# Altium PCB Gen_Test.PcbDoc
Units mm, origin at the board's own origin, x right, y up, seen from the top; angles counter-clockwise.
Board outline 50.29 x 40.51 mm, 2 copper layers (Top Layer, Bottom Layer); 32 components, 31 nets, 130 pads, 75 vias.
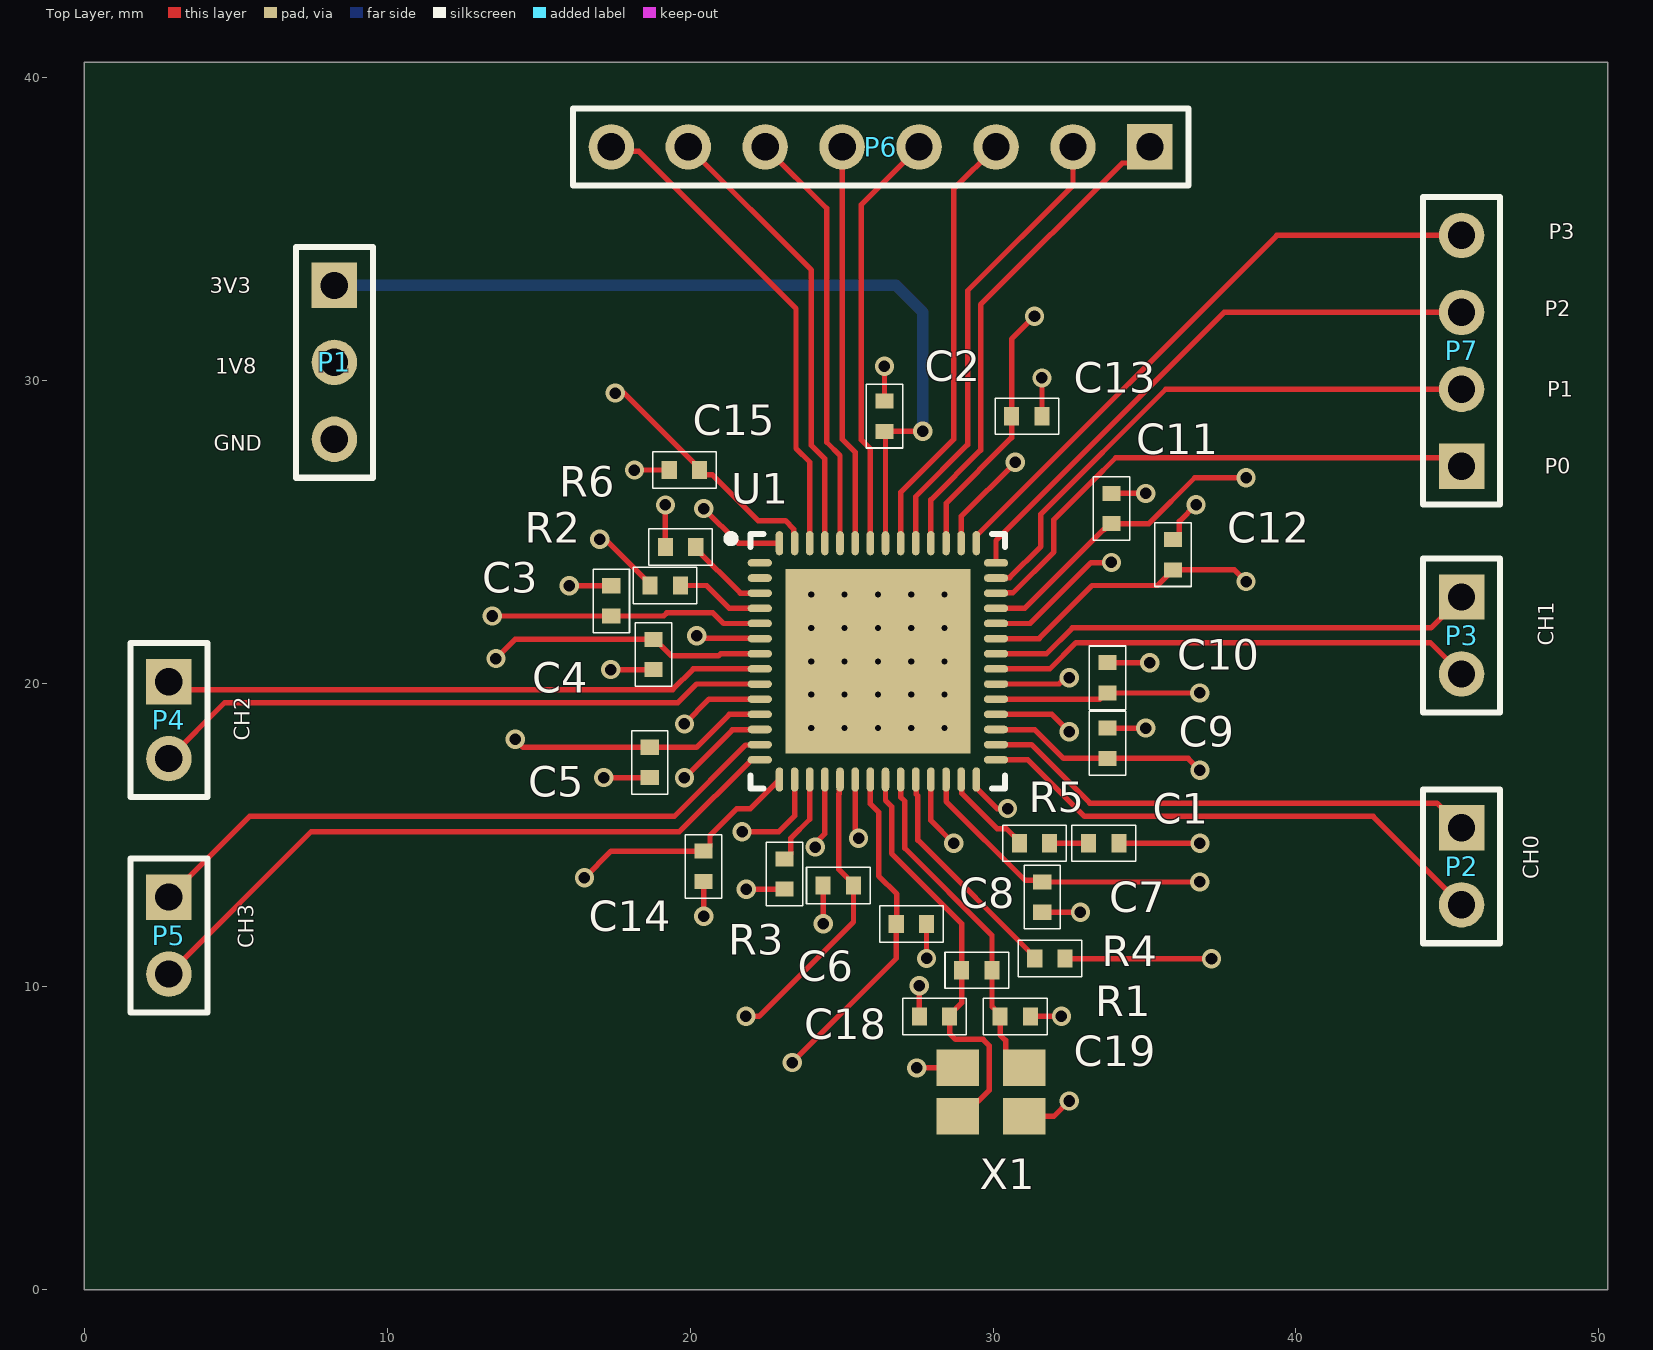
[diagram p0: Top Layer view]
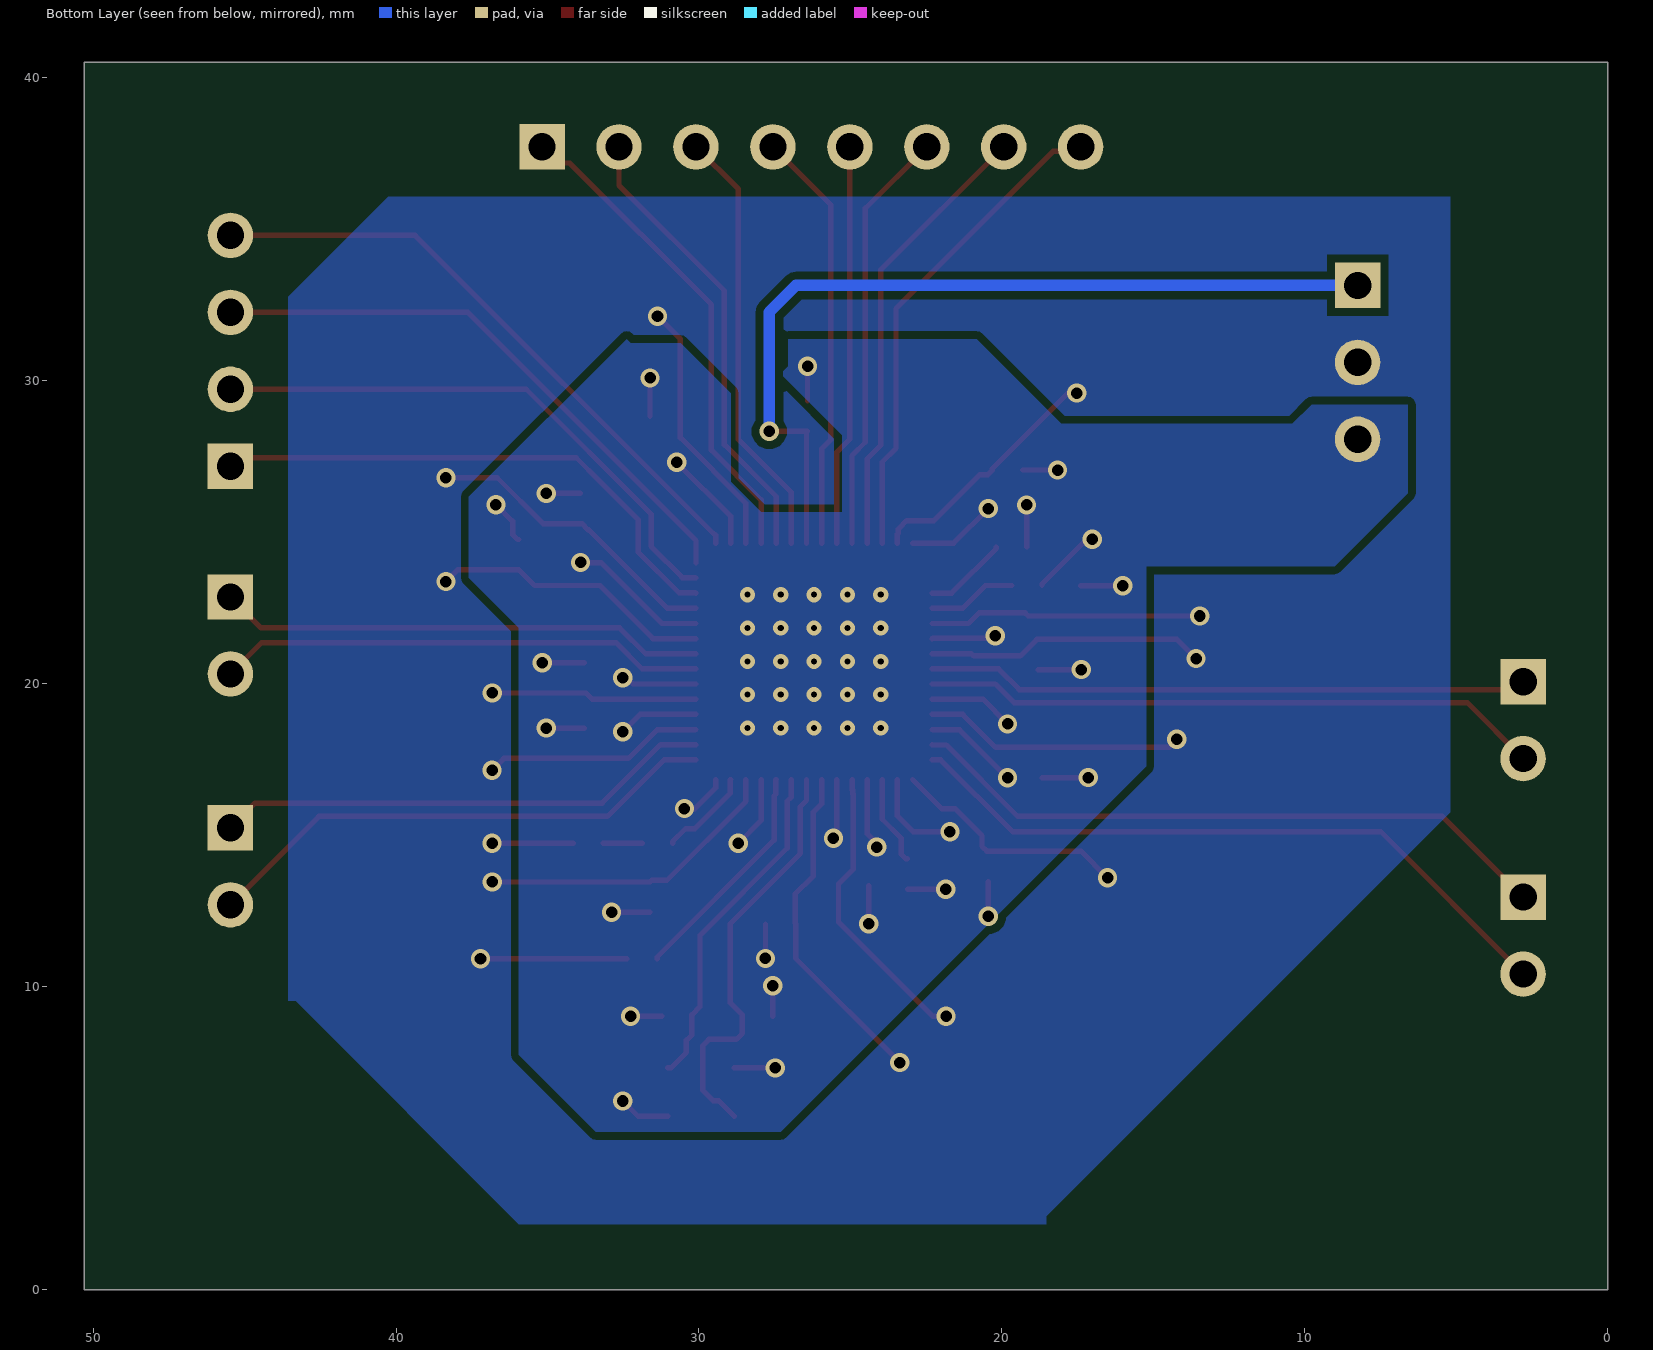
[diagram p1: Bottom Layer view, seen from below]

## Layer stack, top to bottom
Top Solder: solder mask 0.0102, Solder Resist, Dk 3.5
Top Layer: signal copper 0.0356
Dielectric 1: dielectric 0.32, FR-4, Dk 4.8
Bottom Layer: signal copper 0.0356
Bottom Solder: solder mask 0.0102, Solder Resist, Dk 3.5

## Board outline
0,0 0,40.513 50.292,40.513 50.292,0

## Design rules (kind name [scope] priority, off if disabled: settings)
Clearance [All] p1: gap=0.254 ignorepadtopadclearanceinfootprint=FALSE except(0: Arc-Hole Track-Hole SMDPad-Hole THPad-Hole Via-Hole Fill-Hole Poly-Hole Region-Hole Text-Hole)
PolygonConnect [All] p1: connectstyle=Direct reliefconductorwidth=0.254 reliefentries=4 polygonreliefangle="90 Angle" airgapwidth=0.254
RoutingVias RoutingVias_1 [All] p1: holewidth=0.381 width=0.635 viastyle="Through Hole" minholewidth=0.381 minwidth=0.508 maxholewidth=0.711 maxwidth=1.27
RoutingVias [All] p2: holewidth=0.381 width=0.635 viastyle="Through Hole" minholewidth=0.381 minwidth=0.508 maxholewidth=0.711 maxwidth=1.27
SolderMaskExpansion [All] p1: expansion=0.102 istentingtop=FALSE
Width [All] p1: maxlimit=1.27 minlimit=0.178 preferedwidth=0.254 minimp=50.000000 maximp=50.000000 favimp=50.000000
30 further rules are at their usual default settings.

## Classes and differential pairs
component class DDS_Module: C1 C2 C3 C4 C5 C6 C7 C8 C9 C10 C11 C12 C13 C14 C15 P1 P2 P3 P4 P5 P6 P7 R1 R2 R3 R4 R5 R6 U1 X1

## Components (designator, comment, footprint, x,y, rotation, side; value= is the part's Value field where it differs from the comment)
C1 "Cap" 0402_Res 33.655,14.732 r0 top value=680p
C2 "Cap" 0402_Res 26.416,28.829 r270 top value=0.1u
C3 "Cap" 0402_Res 17.399,22.733 r270 top value=0.1u
C4 "Cap" 0402_Res 18.796,20.963 r90 top value=0.1u
C5 "Cap" 0402_Res 18.669,17.399 r90 top value=0.1u
C6 "Cap" 0402_Res 24.892,13.335 r0 top value=0.1u
C7 "Cap" 0402_Res 31.623,12.954 r90 top value=0.1u
C8 "Cap" 0402_Res 27.305,12.065 r180 top value=0.1u
C9 "Cap" 0402_Res 33.782,18.034 r270 top value=0.1u
C10 "Cap" 0402_Res 33.782,20.193 r270 top value=0.1u
C11 "Cap" 0402_Res 33.909,25.781 r270 top value=0.1u
C12 "Cap" 0402_Res 35.941,24.257 r270 top value=0.1u
C13 "Cap" 0402_Res 31.115,28.829 r180 top value=0.1u
C14 "Cap" 0402_Res 20.447,13.97 r90 top value=0.1u
C15 "Cap" 0402_Res 19.812,27.051 r0 top value=0.1u
C18 "Cap" 0402_Res 28.067,9.017 r0 top value=39p
C19 "Cap" 0402_Res 30.734,9.017 r180 top value=39p
P1 "Header 3" HDR1X3 8.255,33.147 r270 top
P2 "Header 2" HDR1X2 45.466,15.24 r270 top
P3 "Header 2" HDR1X2 45.466,22.86 r270 top
P4 "Header 2" HDR1X2 2.794,20.066 r270 top
P5 "Header 2" HDR1X2 2.794,12.954 r270 top
P6 "Header 8" HDR1X8 35.179,37.719 r180 top
P7 "Header 4" HDR1X4 45.466,27.178 r90 top
R1 "DNP" 0402_Res 29.464,10.541 r180 top value=1M
R2 "Res1" 0402_Res 19.177,23.241 r180 top value=4.7k
R3 "Res1" 0402_Res 23.114,13.716 r270 top value=1.91k
R4 "Res1" 0402_Res 31.877,10.922 r180 top value=4.7k
R5 "Res1" 0402_Res 31.369,14.732 r0 top value=0
R6 "Res1" 0402_Res 19.685,24.511 r0 top value=4.7k
U1 "AD9959BCPZ-REEL7" ADI-CP-56-1_L 26.199,20.737 r0 top
X1 "XTAL" XTAL_Basic 31.029,7.315 r180 top

## Footprints (in the part's own frame and the unit in brackets; to place one, negate y for a bottom-side part, rotate by r counter-clockwise, add the part's x,y. Pads: shape width x height; smd on the part's side, far side on the other; paste and mask are expansions set on the pad)
0402_Res [mm]
  rect 0.5x0.6 smd: 1(-0.5,0) 2(0.5,0)
  silkscreen extent -1.05,-0.6 1.05,0.6
ADI-CP-56-1_L [mm] "QFN, 56-Leads, Body 8x8mm, Pitch 0.5mm, Thermal Pad 6.1x6.1mm, IPC High Density"
  oval 0.8x0.25 smd: 1(-3.9,3.25) 2(-3.9,2.75) 3(-3.9,2.25) 4(-3.9,1.75) 5(-3.9,1.25) 6(-3.9,0.75) 7(-3.9,0.25) 8(-3.9,-0.25) 9(-3.9,-0.75) 10(-3.9,-1.25) 11(-3.9,-1.75) 12(-3.9,-2.25) 13(-3.9,-2.75) 14(-3.9,-3.25) 29(3.9,-3.25) 30(3.9,-2.75) 31(3.9,-2.25) 32(3.9,-1.75) 33(3.9,-1.25) 34(3.9,-0.75) 35(3.9,-0.25) 36(3.9,0.25) 37(3.9,0.75) 38(3.9,1.25) 39(3.9,1.75) 40(3.9,2.25) 41(3.9,2.75) 42(3.9,3.25)
  oval 0.25x0.8 smd: 15(-3.25,-3.9) 16(-2.75,-3.9) 17(-2.25,-3.9) 18(-1.75,-3.9) 19(-1.25,-3.9) 20(-0.75,-3.9) 21(-0.25,-3.9) 22(0.25,-3.9) 23(0.75,-3.9) 24(1.25,-3.9) 25(1.75,-3.9) 26(2.25,-3.9) 27(2.75,-3.9) 28(3.25,-3.9) 43(3.25,3.9) 44(2.75,3.9) 45(2.25,3.9) 46(1.75,3.9) 47(1.25,3.9) 48(0.75,3.9) 49(0.25,3.9) 50(-0.25,3.9) 51(-0.75,3.9) 52(-1.25,3.9) 53(-1.75,3.9) 54(-2.25,3.9) 55(-2.75,3.9) 56(-3.25,3.9)
  rect 6.1x6.1 smd: 57(0,0)
  silkscreen extent -4.97,-4.2 4.2,4.2, body extent -4.05,-4.05 4.05,4.05, height 1
HDR1X2 [mm] "Connector; Header; 2 Position"
  rect 1.5x1.5 hole 0.9: 1(0,0)
  round 1.5 hole 0.9: 2(2.54,0)
  silkscreen extent -1.27,-1.27 3.81,1.27
HDR1X3 [mm] "Connector; Header; 3 Position"
  rect 1.5x1.5 hole 0.9: 1(0,0)
  round 1.5 hole 0.9: 2(2.54,0) 3(5.08,0)
  silkscreen extent -1.27,-1.27 6.35,1.27
HDR1X4 [mm] "Connector; Header; 4 Position"
  rect 1.5x1.5 hole 0.9: 1(0,0)
  round 1.5 hole 0.9: 2(2.54,0) 3(5.08,0) 4(7.62,0)
  silkscreen extent -1.27,-1.27 8.89,1.27
HDR1X8 [mm] "Connector; Header; 8 Position"
  rect 1.5x1.5 hole 0.9: 1(0,0)
  round 1.5 hole 0.9: 2(2.54,0) 3(5.08,0) 4(7.62,0) 5(10.16,0) 6(12.7,0) 7(15.24,0) 8(17.78,0)
  silkscreen extent -1.27,-1.27 19.05,1.27
XTAL_Basic [mm]
  rect 1.4x1.2 smd: 1(0,0) 2(2.2,0) 3(2.2,1.6) 4(0,1.6)

## Part data
C1 C2 C3 C4 C5 C6 C7 C8 C9 C10 C11 C12 C13 C14 C15 C18 C19: "Capacitor", LatestRevisionDate=17-Jul-2002, LatestRevisionNote="Re-released for DXP Platform.", PackageDescription="Radial Cap, Thru-Hole; 2 Leads; 0.3 in Pin Spacing", PackageReference=RAD-0.3, Published=8-Jun-2000, Publisher="Altium Limited"
P1: "Header, 3-Pin", LatestRevisionDate=17-Jul-2002, LatestRevisionNote="Re-released for DXP Platform.", Publisher="Altium Limited"
P2 P3 P4 P5: "Header, 2-Pin", LatestRevisionDate=17-Jul-2002, LatestRevisionNote="Re-released for DXP Platform.", Publisher="Altium Limited"
P6: "Header, 8-Pin", LatestRevisionDate=17-Jul-2002, LatestRevisionNote="Re-released for DXP Platform.", Publisher="Altium Limited"
P7: "Header, 4-Pin", LatestRevisionDate=17-Jul-2002, LatestRevisionNote="Re-released for DXP Platform.", Publisher="Altium Limited"
R1: library part Res1, "Resistor", LatestRevisionDate=17-Jul-2002, LatestRevisionNote="Re-released for DXP Platform.", PackageDescription="Axial Device, Thru-Hole; 2 Leads; 0.3 in Pin Spacing", PackageReference=AXIAL-0.3, Published=8-Jun-2000, Publisher="Altium Limited"
R2 R3 R4 R5 R6: "Resistor", LatestRevisionDate=17-Jul-2002, LatestRevisionNote="Re-released for DXP Platform.", PackageDescription="Axial Device, Thru-Hole; 2 Leads; 0.3 in Pin Spacing", PackageReference=AXIAL-0.3, Published=8-Jun-2000, Publisher="Altium Limited"
U1: library part CMP-0293-00013-1, "4-Channel, 500 MSPS DDS with 10-Bit DACs, Serial, CP-56-1, 750 Reel, Pb-Free", Code_JEDEC=MO-220-VLLD-2, Compliance Range (V)=2.3V, ComponentLink1Description="Manufacturer URL", ComponentLink1URL=www.analog.com, ComponentLink2Description=Datasheet, ComponentLink2URL=http://www.analog.com/static/imported-files/data_sheets/AD9959.pdf, ComponentLink3Description="Package Specification", ComponentLink3URL=http://www.analog.com/static/imported-files/packages/32698137492825CP_56_1.pdf, DatasheetVersion="Rev. B", FS Iout (mA nom)=10mA, I Supply total (max)=180mA, I/O Interface=Serial, Master fclk=500MHz, PackageDescription="56-Lead Lead Frame Chip Scale Package [LFCSP_VQ]", PackageReference=CP-56-1, PackageVersion=112805-0, REFCLK Multiplier=Yes, Resolution (Bits)=10bit, Tuning Word Width (bits)=32bit
X1: Supplier Part Number 1=SER3691CT-ND, ComponentLink1Description="New link", Supplier 1=DigiKey

## Via types
v1: diameter 0.635, hole 0.381, Top Layer to Bottom Layer, 50 vias
v2: diameter 0.5, hole 0.2, Top Layer to Bottom Layer, 25 vias

## Nets (pads, with @x,y where several pads share a name; then routed paths per layer and width w, separated by ;. In a path a pad name is that pad's centre, name@x,y a point inside that pad or via, vN(x,y) a via of type N, cw(c..) or ccw(c..) an arc to the next point about the centre after c; other vN are vias at no path point)
1V8: C1.2 C3.2 C4.2 C5.2 C6.2 C7.2 C8.2 C9.2 C10.2 C11.2 C12.2 C13.2 C14.2 C15.2 P1.2 R4.1 U1.5 U1.7 U1.11 U1.15 U1.19 U1.21 U1.26 U1.31 U1.33 U1.37 U1.39 U1.45 U1.55 | length 123.9
  Top Layer w0.178: v1(13.47,22.233) C3.2 19.129,22.233 19.234,22.338 20.752,22.338 21.103,21.987 U1.5 ; v1(13.589,20.828) 14.224,21.463 C4.2 18.846,21.463 19.39,20.919 20.939,20.919 21.007,20.987 U1.7 ; v1(14.224,18.161) 14.486,17.899 C5.2 20.209,17.899 21.297,18.987 U1.11 ; v1(16.51,13.589) 17.391,14.47 C14.2 20.497,14.47 20.658,14.631 20.658,14.988 21.545,15.875 21.987,15.875 U1.15 ; v1(17.526,29.591) 17.822,29.591 20.312,27.101 C15.2 20.463,26.9 20.725,26.9 22.245,25.38 23.143,25.38 23.417,25.106 23.417,24.964 23.449,24.932 U1.55 ; v1(21.844,9.017) 22.27,9.017 25.392,12.139 C6.2 25.392,13.385 24.901,13.876 24.901,16.352 24.917,16.368 24.917,16.479 24.935,16.497 24.935,16.823 U1.19 ; v1(23.368,7.493) 26.805,10.93 C8.2 26.822,12.082 26.822,13.056 26.222,13.656 26.222,15.761 25.949,16.034 U1.21 ; U1.26 28.449,16.117 31.056,13.51 31.567,13.51 C7.2 v1(36.822,13.454) ; U1.45 28.449,25.954 30.615,28.12 C13.2 30.615,31.377 v1(31.369,32.131) ; U1.31 30.113,18.473 31.387,18.473 32.326,17.534 C9.2 36.441,17.534 v1(36.83,17.145) ; U1.33 33.526,19.487 33.732,19.693 C10.2 v1(36.822,19.693) ; U1.37 31.52,21.487 33.274,23.241 35.425,23.241 C12.2 37.965,23.757 v1(38.354,23.368) ; U1.39 31.045,22.487 33.635,25.078 33.656,25.078 33.859,25.281 C11.2 35.142,25.281 36.658,26.797 v1(38.354,26.797) ; R4.1 v1(37.211,10.922) ; C1.2 v1(36.83,14.732)
3V3: C2.2 P1.1 U1.49 | length 28.7
  Top Layer w0.178: U1.49 26.449,28.296 C2.2 v1(27.678,28.329)
  Bottom Layer w0.381: P1.1 26.797,33.147 27.678,32.266 v1(27.678,28.329)
\C\S\: P6.2 U1.47 | length 15.2
  Top Layer w0.178: U1.47 27.449,26.179 29.159,27.889 29.159,32.969 32.639,36.449 P6.2
\X\T\A\L\: C18.2 R1.2 U1.22 X1.3 | length 13.9
  Top Layer w0.178: U1.22 26.449,16.145 26.654,15.94 26.654,14.392 28.964,12.081 R1.2 28.964,9.464 28.567,9.067 C18.2 28.567,8.45 28.759,8.258 29.671,8.258 29.872,8.057 29.872,6.573 29.525,6.226 29.34,6.226 X1.3
GND: C2.1 C3.1 C4.1 C5.1 C6.1 C7.1 C8.1 C9.1 C10.1 C11.1 C12.1 C13.1 C14.1 C15.1 C18.1 C19.1 P1.3 R2.2 R3.2 R6.1 U1.6 U1.10 U1.12 U1.16 U1.18 U1.20 U1.25 U1.28 U1.32 U1.34 U1.38 U1.44 U1.56 U1.57 X1.2 X1.4 | length 63.8
  Top Layer w0.178: v1(16.01,23.233) C3.1 ; v1(17.018,24.765) 17.203,24.765 18.677,23.291 R2.2 ; v1(17.153,16.899) C5.1 ; v1(17.383,20.463) C4.1 ; v1(18.161,27.051) C15.1 ; R6.1 v1(19.185,25.9) ; v1(19.812,16.891) 21.394,18.473 22.285,18.473 U1.12 ; v1(19.812,18.669) 20.63,19.487 U1.10 ; v1(20.217,21.579) 20.295,21.501 22.285,21.501 U1.6 ; v1(20.447,12.319) C14.1 ; v1(20.447,25.781) 21.591,24.637 U1.56 ; v1(21.717,15.113) 22.928,15.113 23.449,15.634 U1.16 ; v1(21.852,13.216) R3.2 ; v1(24.13,14.605) 24.13,14.729 24.449,15.048 U1.18 ; v1(24.392,12.073) C6.1 ; U1.20 25.449,15.184 25.474,15.159 25.474,14.988 v1(25.561,14.9) ; C2.1 v1(26.416,30.48) ; v1(27.483,7.315) X1.2 ; C18.1 v1(27.567,10.025) ; v1(27.805,10.93) C8.1 ; U1.25 27.949,15.485 v1(28.702,14.732) ; U1.44 28.949,25.52 v1(30.734,27.305) ; U1.28 29.449,16.562 30.136,15.875 v1(30.48,15.875) ; U1.32 31.94,18.987 v1(32.512,18.415) ; U1.34 32.182,19.987 32.388,20.193 v1(32.512,20.193) ; U1.38 31.226,21.987 33.236,23.997 33.903,23.997 v1(33.909,24.003) ; X1.4 32.004,5.715 v1(32.512,6.223) ; C19.1 v1(32.258,9.017) ; C13.1 v1(31.615,30.091) ; C7.1 v1(32.885,12.454) ; C9.1 v1(35.044,18.534) ; C10.1 v1(35.171,20.693) ; C11.1 v1(35.044,26.281) ; C12.1 35.991,24.757 36.152,24.918 36.152,25.357 v1(36.703,25.908)
  other v2: 23.999,18.537 25.099,18.537 26.199,18.537 27.299,18.537 28.399,18.537 23.999,19.637 25.099,19.637 26.199,19.637 27.299,19.637 28.399,19.637 23.999,20.737 25.099,20.737 26.199,20.737 27.299,20.737 28.399,20.737 23.999,21.837 25.099,21.837 26.199,21.837 27.299,21.837 28.399,21.837 23.999,22.937 25.099,22.937 26.199,22.937 27.299,22.937 28.399,22.937
I/O_UPDATE: P6.1 U1.46 | length 16.3
  Top Layer w0.178: U1.46 27.949,26.068 29.591,27.711 29.591,32.512 34.266,37.187 34.647,37.187 P6.1
NetC1_1: C1.1 R5.2 | length 1.3
  Top Layer w0.178: R5.2 C1.1
NetP2_1: P2.1 U1.30 | length 16.5
  Top Layer w0.178: U1.30 31.262,17.987 33.196,16.053 44.653,16.053 P2.1
NetP2_2: P2.2 U1.29 | length 17.3
  Top Layer w0.178: U1.29 31.151,17.487 33.017,15.621 42.545,15.621 P2.2
NetP3_1: P3.1 U1.36 | length 16.1
  Top Layer w0.178: U1.36 31.761,20.987 32.618,21.844 44.45,21.844 P3.1
NetP3_2: P3.2 U1.35 | length 16.2
  Top Layer w0.178: U1.35 31.872,20.487 32.738,21.353 44.433,21.353 P3.2
NetP4_1: P4.1 U1.8 | length 19.9
  Top Layer w0.178: P4.1 3.057,19.803 19.422,19.803 20.106,20.487 U1.8
NetP4_2: P4.2 U1.9 | length 20.5
  Top Layer w0.178: P4.2 4.639,19.371 19.6,19.371 20.217,19.987 U1.9
NetP5_1: P5.1 U1.13 | length 21.6
  Top Layer w0.178: P5.1 5.461,15.621 19.476,15.621 21.828,17.973 22.285,17.973 U1.13
NetP5_2: P5.2 U1.14 | length 22.4
  Top Layer w0.178: P5.2 7.493,15.113 19.65,15.113 22.024,17.487 U1.14
NetR2_1: R2.1 U1.4 | length 2.9
  Top Layer w0.178: R2.1 20.544,23.241 21.298,22.487 U1.4
NetR3_1: R3.1 U1.17 | length 3
  Top Layer w0.178: R3.1 23.164,14.216 23.325,14.377 23.325,14.899 23.949,15.523 U1.17
NetR4_2: R4.2 U1.24 | length 7.5
  Top Layer w0.178: U1.24 27.463,16.823 27.463,16.352 27.517,16.298 27.517,14.832 31.377,10.972 R4.2
NetR5_1: R5.1 U1.27 | length 3.1
  Top Layer w0.178: U1.27 28.963,16.823 28.963,16.386 30.135,15.215 30.436,15.215 30.869,14.782 R5.1
NetR6_2: R6.2 U1.3 | length 2.8
  Top Layer w0.178: R6.2 20.185,24.461 21.659,22.987 U1.3
P0: P7.1 U1.40 | length 18
  Top Layer w0.178: U1.40 30.113,23.001 30.66,23.001 32.008,24.349 32.008,25.415 33.266,26.673 34.05,27.457 45.187,27.457 P7.1
P1: P7.2 U1.41 | length 18.6
  Top Layer w0.178: U1.41 30.113,23.501 30.55,23.501 31.576,24.528 31.576,25.594 35.7,29.718 P7.2
P2: P7.3 U1.42 | length 19.2
  Top Layer w0.178: U1.42 30.099,24.727 37.63,32.258 P7.3
P3: P7.4 U1.43 | length 20.4
  Top Layer w0.178: U1.43 29.449,24.892 29.505,24.948 29.52,24.948 39.37,34.798 P7.4
SCLK: P6.3 U1.48 | length 14.4
  Top Layer w0.178: U1.48 26.949,26.314 28.702,28.067 28.702,36.322 P6.3
SDIO_0: P6.4 U1.50 | length 14
  Top Layer w0.178: U1.50 25.949,27.753 25.654,28.048 25.654,35.814 P6.4
SDIO_1: P6.5 U1.51 | length 13.3
  Top Layer w0.178: P6.5 25.019,28.072 25.449,27.642 U1.51
SDIO_2: P6.6 U1.52 | length 14.1
  Top Layer w0.178: P6.6 24.511,35.687 24.511,27.969 24.949,27.531 U1.52
SDIO_3: P6.7 U1.53 | length 15
  Top Layer w0.178: P6.7 24.003,33.655 24.003,27.867 24.449,27.421 U1.53
SYNC_CLK: P6.8 U1.54 | length 16.2
  Top Layer w0.178: P6.8 17.55,37.568 18.312,37.568 23.495,32.385 23.495,27.764 23.949,27.31 U1.54
XTAL: C19.2 R1.1 U1.23 X1.1 | length 11.3
  Top Layer w0.178: U1.23 26.949,16.255 27.085,16.119 27.085,14.571 29.964,11.692 R1.1 29.964,9.337 30.234,9.067 C19.2 30.234,8.408 30.418,8.224 30.418,7.826 30.929,7.315 X1.1
pads on no net: U1.1 U1.2

## Polygon pours and split planes (outlines as drawn)
1V8 on Bottom Layer "1V8_L02_P002" (solid, remove dead copper, pour order 2): 5.207,36.068 40.259,36.068 43.561,32.766 43.561,9.525 43.307,9.525 35.941,2.159 18.542,2.159 18.542,2.413 5.207,15.748
GND on Bottom Layer "GND_L02_P001" (solid, remove dead copper, pour order 1): 6.604,29.21 6.604,26.289 9.017,23.876 15.748,23.876 15.748,25.908 18.415,28.575 10.414,28.575 9.779,29.21
GND on Bottom Layer "GND_L02_P000" (solid, remove dead copper, pour order 0): 15.24,25.781 15.24,17.272 27.305,5.207 33.401,5.207 35.941,7.747 35.941,21.844 37.592,23.495 37.592,26.162 32.385,31.369 32.258,31.242 30.607,31.242 28.956,29.591 28.956,26.67 27.94,25.654 25.273,25.654 25.273,28.194 27.305,30.226 27.051,30.48 27.051,31.369 20.828,31.369

## Silkscreen, mask and mechanical layers (free items; w line width, h text height)
Top Overlay:
  text "P3" at 48.345,34.671 h0.51
  text "3V3" at 4.149,32.893 h0.51
  text "P2" at 48.218,32.131 h0.51
  text "1V8" at 4.318,30.226 h0.51
  text "P1" at 48.302,29.464 h0.51
  text "GND" at 4.276,27.686 h0.51
  text "P0" at 48.218,26.924 h0.51
  text "CH1" at 48.514,21.252 h0.51 r90
  text "CH2" at 5.461,18.119 h0.51 r90
  text "CH0" at 48.006,13.547 h0.51 r90
  text "CH3" at 5.588,11.261 h0.51 r90
Mechanical 1:
  the board outline again, w0.254